# EAGLE board pulse-generator (EAGLE 7.6.0)
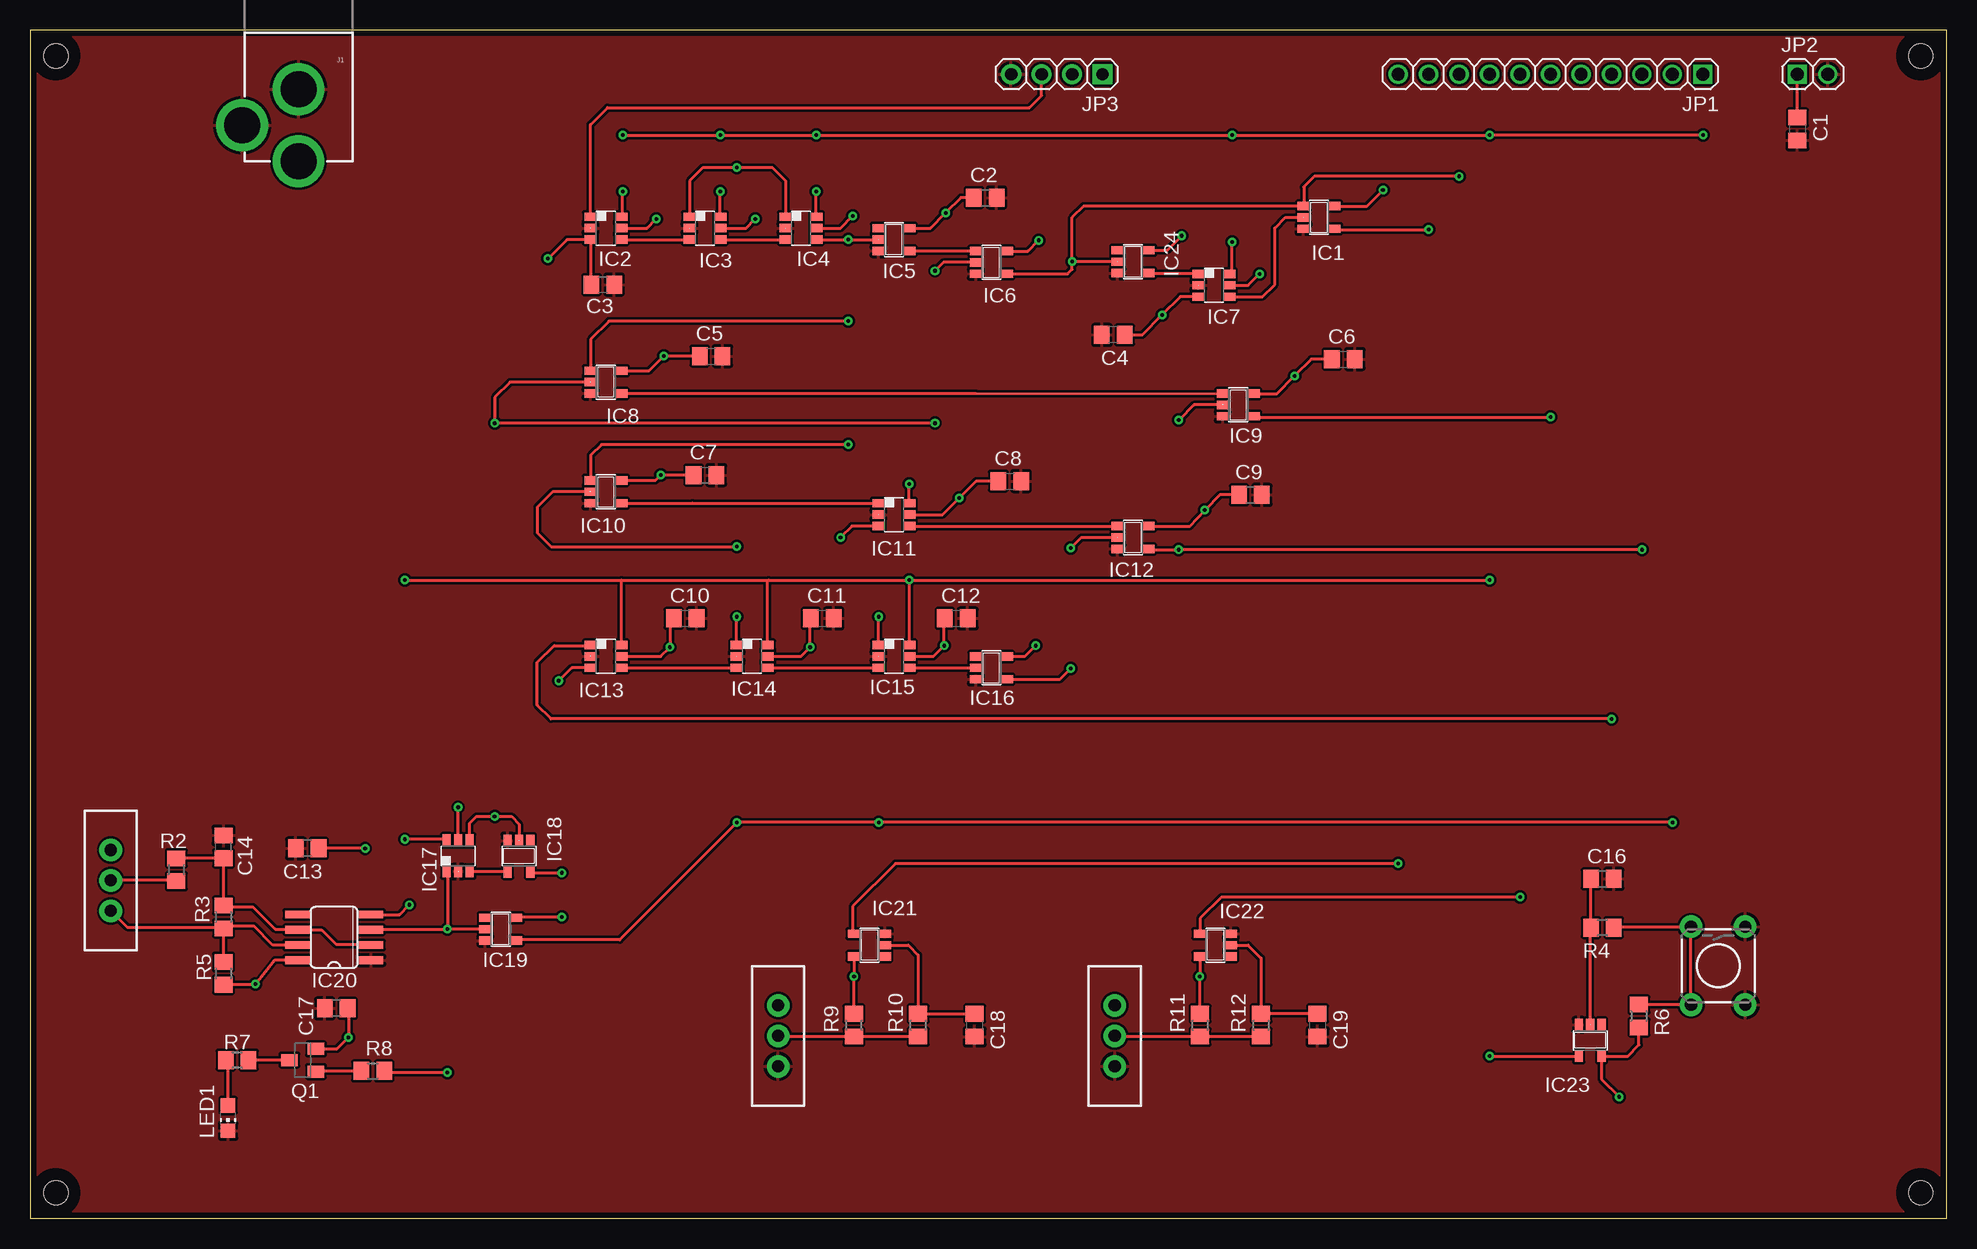
[diagram p0: board, top side]
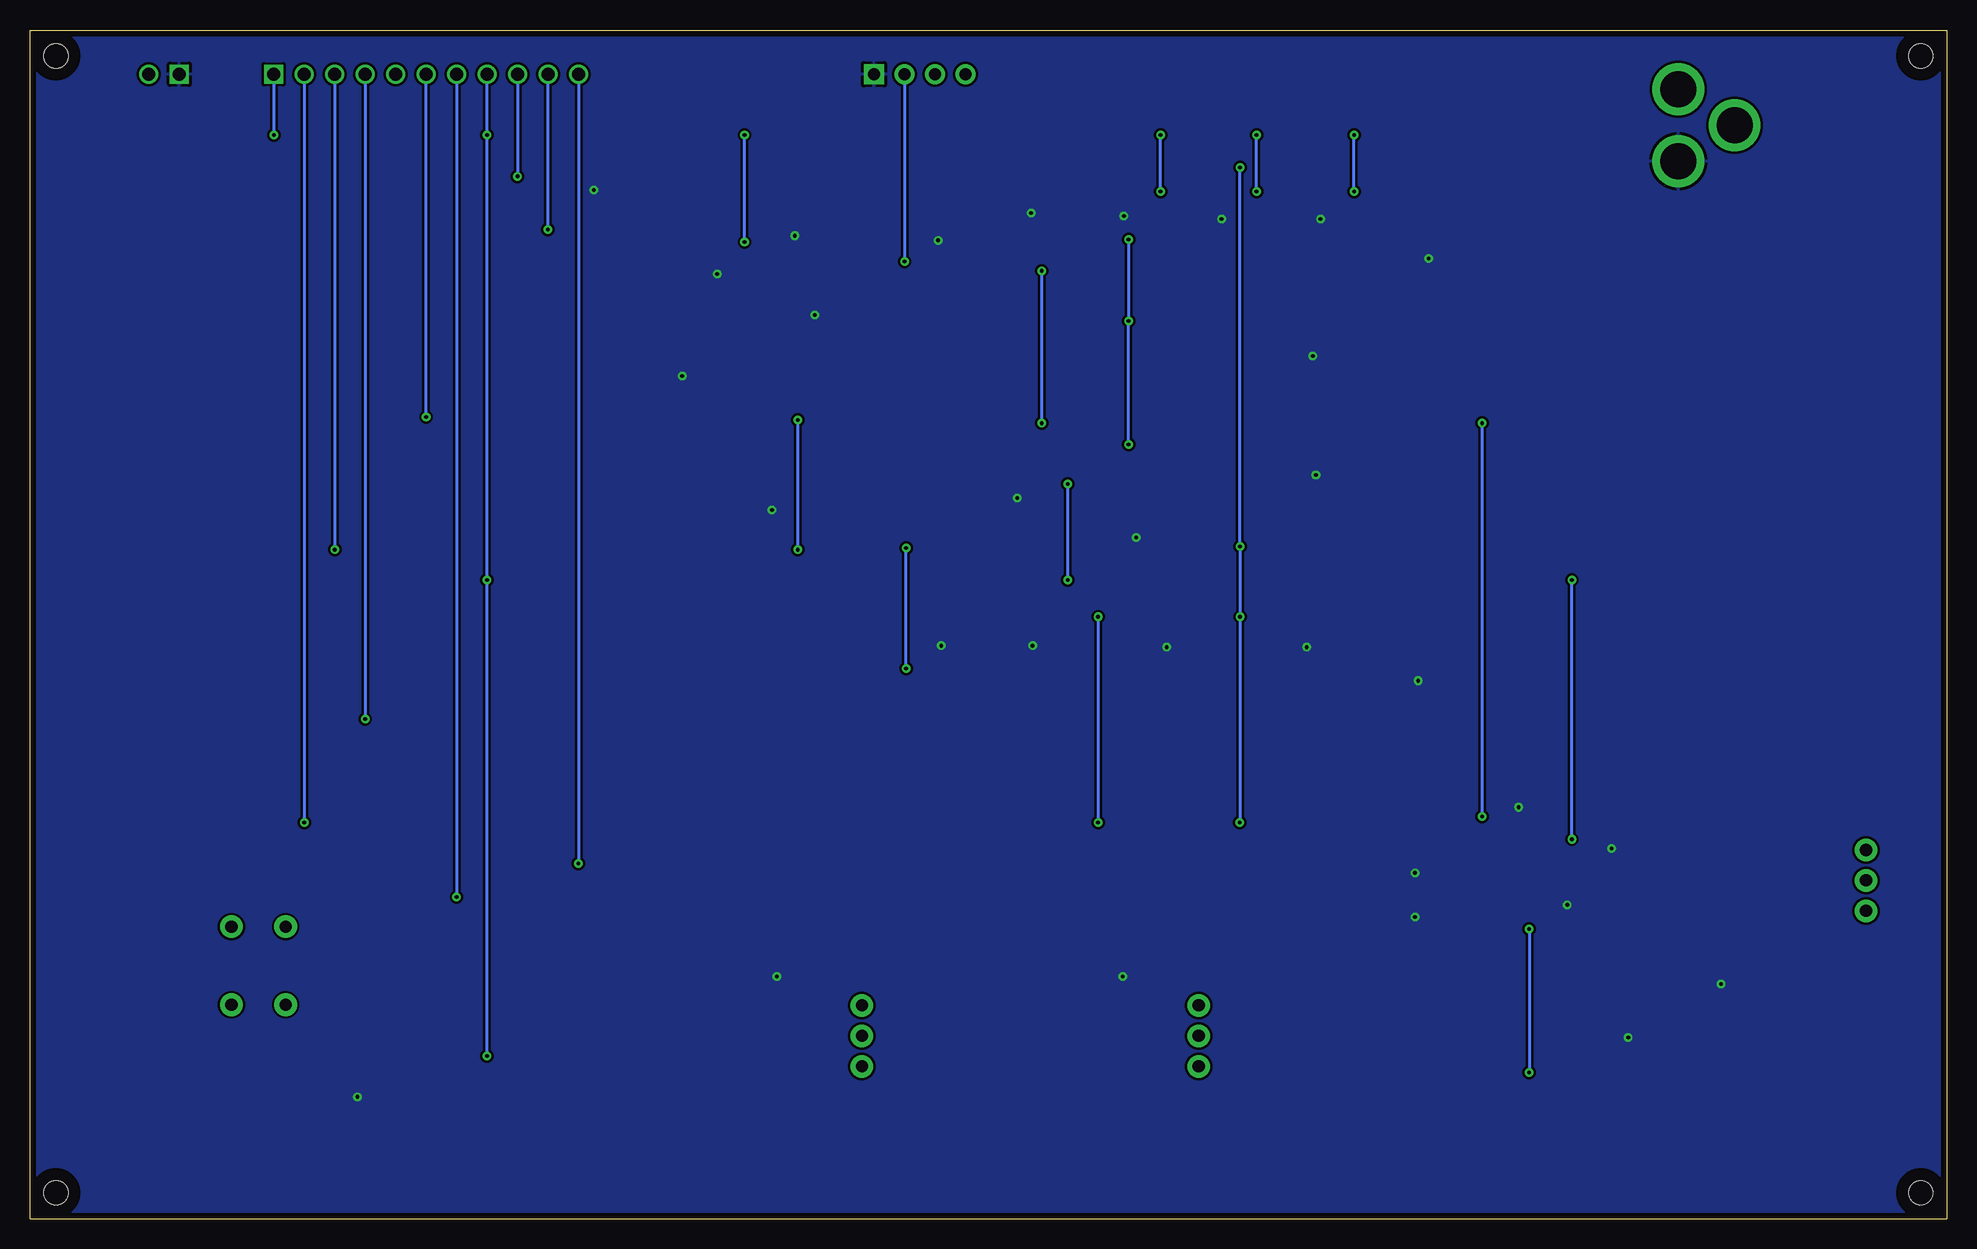
[diagram p1: board, bottom side, seen from below]

Size 159.77 x 99.06 mm. Coordinates in mm from the lower left corner, seen from the top.
Outline: 159.77,99.06 0,99.06 0,0 159.77,0 159.77,99.06
Copper layers (1*16): Top 0.035mm / dielectric 1.5mm / Bottom 0.035mm
Design rules "default *": minimum track width 8mil, minimum drill 12mil, track to track 8mil, track to pad 8mil, pad to pad 8mil, via to via 8mil, smd to smd 8mil, copper to edge 20mil, drill to drill 8mil, minimum pad ring 10mil, minimum via ring 8mil, stop-mask expansion 4mil, vias tented up to drill 0mil, thermal gap 10mil
Holes 2.01 mm at 2.16,2.16 157.61,2.16 157.61,96.9 2.16,96.9
tRestrict: area 155.6,0.2 to 159.6,4.2; area 155.6,94.9 to 159.6,98.9; area 0.2,94.9 to 4.2,98.9; area 0.2,0.2 to 4.2,4.2
bRestrict: area 155.6,0.2 to 159.6,4.2; area 155.6,94.9 to 159.6,98.9; area 0.2,94.9 to 4.2,98.9; area 0.2,0.2 to 4.2,4.2

## Footprints (pad centres in the part's own frame; a part is rotated, then mirrored left to right if it is on the bottom)
C0805 = smd 1.3 x 1.5: 1 -0.95,0; 2 0.95,0
SOT23-5 = smd 0.69 x 0.99: 1 -0.95,-1.29; 2 0,-1.29; 3 0.95,-1.29; 4 0.95,1.3; 5 -0.95,1.3
DBV_R-PDSO-G6 = smd 0.69 x 0.99: 1 -0.95,-1.29; 2 0,-1.29; 3 0.95,-1.29; 4 0.95,1.3; 5 0,1.3; 6 -0.95,1.3
SO08 = smd 0.66 x 2.032: 1 -1.905,-3.073; 2 -0.635,-3.073; 3 0.635,-3.073; 4 1.905,-3.073; 5 1.905,3.073; 6 0.635,3.073; 7 -0.635,3.073; 8 -1.905,3.073
POWER_JACK_PTH = drill 2.997 pad 4.318: GND 0,7.7; GNDBREAK 4.7,10.7; PWR 0,13.7
1X11 = drill 1.067 square: 1 -12.7,0 | drill 1.067: 2 -10.16,0; 3 -7.62,0; 4 -5.08,0; 5 -2.54,0; 6 0,0; 7 2.54,0; 8 5.08,0; 9 7.62,0; 10 10.16,0; 11 12.7,0
1X02 = drill 1.067 square: 1 -1.27,0 | drill 1.067: 2 1.27,0
1X04 = drill 1.016 pad 1.676 square: 1 -3.81,0 | drill 1.016 pad 1.676: 2 -1.27,0; 3 1.27,0; 4 3.81,0
CHIP-LED0805 = smd 1.2 x 1.2: A 0,-1.05; C 0,1.05
SOT23-BEC = smd 1 x 1.4: B -0.95,-1.1; C 0,1.1; E 0.95,-1.1
R0805 = smd 1.3 x 1.5: 1 -0.95,0; 2 0.95,0
SWITCH-SPDT = drill 1.016 pad 1.88: 1 0,2.54; 2 0,0; 3 0,-2.54
TACTILE-PTH = drill 1.016 pad 1.88: 1 -3.251,2.261; 2 3.251,2.261; 3 -3.251,-2.261; 4 3.251,-2.261

## Placement (x,y rotation side)
C1  10uF  [C0805]  147.32,90.81 270 top
C2  10uF  [C0805]  79.63,85.09 0 top
C3  1uF  [C0805]  47.75,77.85 0 top
C4  10uF  [C0805]  90.3,73.66 180 top
C5  10uF  [C0805]  56.77,71.88 0 top
C6  1uF  [C0805]  109.47,71.63 0 top
C7  1uF  [C0805]  56.26,61.98 0 top
C8  10uF  [C0805]  81.66,61.47 0 top
C9  1uF  [C0805]  101.73,60.33 0 top
C10  10uF  [C0805]  54.61,50.04 0 top
C11  1uF  [C0805]  66.04,50.04 0 top
C12  1uF  [C0805]  77.22,50.04 0 top
C13  10uF  [C0805]  23.11,30.86 180 top
C14  10uF  [C0805]  16.13,30.99 90 top
C16  10uF  [C0805]  131.06,28.32 0 top
C17  10uF  [C0805]  25.53,17.53 180 top
C18  [C0805]  78.74,16.13 270 top
C19  [C0805]  107.31,16.13 270 top
IC1  74LVC1G08DBV  [SOT23-5]  107.44,83.44 270 top
IC2  741G175  [DBV_R-PDSO-G6]  48.01,82.55 270 top
IC3  741G175  [DBV_R-PDSO-G6]  56.26,82.55 270 top
IC4  741G175  [DBV_R-PDSO-G6]  64.26,82.55 270 top
IC5  74LVC1G04DBV  [SOT23-5]  72.01,81.6 270 top
IC6  74LVC1G08DBV  [SOT23-5]  80.14,79.69 270 top
IC7  741G175  [DBV_R-PDSO-G6]  98.68,77.79 270 top
IC8  74LVC1G08DBV  [SOT23-5]  48.01,69.72 270 top
IC9  74LVC1G08DBV  [SOT23-5]  100.71,67.82 270 top
IC10  74LVC1G08DBV  [SOT23-5]  48.01,60.58 270 top
IC11  741G175  [DBV_R-PDSO-G6]  72.01,58.67 270 top
IC12  74LVC1G08DBV  [SOT23-5]  91.95,56.77 270 top
IC13  741G175  [DBV_R-PDSO-G6]  48.01,46.86 270 top
IC14  741G175  [DBV_R-PDSO-G6]  60.2,46.86 270 top
IC15  741G175  [DBV_R-PDSO-G6]  72.01,46.86 270 top
IC16  74LVC1G04DBV  [SOT23-5]  80.14,45.91 270 top
IC17  741G175  [DBV_R-PDSO-G6]  35.69,30.23 0 top
IC18  74LVC1G04DBV  [SOT23-5]  40.77,30.23 180 top
IC19  74LVC1G04DBV  [SOT23-5]  39.24,24.13 270 top
IC20  NE555D  [SO08]  25.35,23.44 90 top
IC21  74LVC1G17DBV  [SOT23-5]  69.98,22.8 90 top
IC22  74LVC1G17DBV  [SOT23-5]  98.81,22.8 90 top
IC23  74LVC1G17DBV  [SOT23-5]  130.05,14.86 180 top
IC24  74LVC1G04DBV  [SOT23-5]  91.95,79.76 270 top
J1  POWER_JACKPTH  [POWER_JACK_PTH]  22.38,101.83 180 top
JP1  [1X11]  126.75,95.38 180 top
JP2  [1X02]  148.59,95.38 0 top
JP3  [1X04]  85.6,95.38 180 top
LED1  [CHIP-LED0805]  16.51,8.38 180 top
Q1  MMBT2907ALT1SMD  [SOT23-BEC]  22.73,13.21 90 top
R2  8.2K  [R0805]  12.19,29.08 270 top
R3  33K  [R0805]  16.13,25.15 270 top
R4  10k  [R0805]  131.06,24.26 180 top
R5  1K  [R0805]  16.13,20.45 270 top
R6  100k  [R0805]  134.11,16.89 270 top
R7  270  [R0805]  17.27,13.21 180 top
R8  1K  [R0805]  28.57,12.32 0 top
R9  [R0805]  68.68,16.13 90 top
R10  [R0805]  74.04,16.13 90 top
R11  [R0805]  97.54,16.13 90 top
R12  [R0805]  102.62,16.13 90 top
S1  [SWITCH-SPDT]  6.73,28.19 0 top
S2  [TACTILE-PTH]  140.72,21.08 270 top
S3  [SWITCH-SPDT]  62.36,15.24 0 top
S4  [SWITCH-SPDT]  90.42,15.24 0 top

## Library data of the parts
C1-C14 C16-C19 R2-R12 = resistor
IC1 IC5 IC6 IC8-IC10 IC12 IC16 IC18 IC19 IC21-IC24 = 74xx-little-us
IC2-IC4 IC7 IC11 IC13-IC15 IC17 = witch-e
IC20 = adafruit
J1 = SparkFun-Connectors; PROD_ID: PRT-00119
JP1-JP3 = pinhead
LED1 = led
Q1 = transistor-pnp
S1-S4 = SparkFun-Electromechanical

## Nets
9A_PULSE: IC1.4 JP1.10
10A_PULSE: IC1.1 IC6.4 IC24.2 JP1.9 JP3.2
!MCLK: IC3.1 IC4.1 IC10.2 IC14.1 IC15.1 IC19.4 JP1.2
!RST: IC2.6 IC3.6 IC4.6 IC7.6 IC11.6 IC13.6 IC14.6 IC15.6 IC17.6 IC23.4 JP1.1 JP1.8
!TDONE: IC5.4 IC6.1
ADD/COMP: IC22.4 JP1.7
CARRY_DONE: IC13.1 JP1.4
CARRY_OE: IC9.2 IC12.4 JP1.3
CARRY_PULSE: IC9.4 JP1.6
CLR: IC21.4 JP1.11
GND: C1.2 C2.2 C3.2 C4.2 C5.2 C6.2 C7.2 C8.2 C9.2 C10.2 C11.2 C12.2 C13.2 C14.2 C16.2 C17.2 C18.2 C19.2 IC1.3 IC2.2 IC3.2 IC4.2 IC5.3 IC6.3 IC7.2 IC8.3 IC9.3 IC10.3 IC11.2 IC12.3 IC13.2 IC14.2 IC15.2 IC16.3 IC17.2 IC18.3 IC19.3 IC20.1 IC21.3 IC22.3 IC23.3 IC24.3 J1.GND J1.GNDBREAK JP2.2 JP3.4 LED1.C S2.1 S2.2 S3.3 S4.3
MCLK: IC17.1 IC19.2 IC20.3 R8.2
N$1: IC17.3 IC18.4
N$2: C14.1 IC20.2 IC20.6 R2.1 R3.1
N$3: IC20.7 R3.2 R5.1 S1.3
N$4: R2.2 S1.2
N$5: Q1.B R8.1
N$6: Q1.C R7.1
N$7: LED1.A R7.2
N$8: IC2.4 IC3.3
N$9: IC8.4 IC9.1
N$11: IC13.4 IC14.3
N$12: IC1.2 IC7.4
N$13: IC12.2 IC16.4
N$14: IC3.4 IC4.3
N$15: IC11.4 IC12.1
N$16: IC10.4 IC11.1
N$17: IC14.4 IC15.3
N$18: IC15.4 IC16.2
N$19: C16.1 IC23.2 R4.2
N$20: R4.1 R6.1 S2.3 S2.4
N$21: C18.1 IC21.2 R10.2
N$22: R9.1 R10.1 S3.2
N$23: IC7.1 IC24.4
N$29: C19.1 IC22.2 R12.2
N$30: R11.1 R12.1 S4.2
TCLK: IC6.2 IC8.2 IC17.4 IC18.2
TDONE: IC4.4 IC5.2 IC8.1 IC10.1
VCC: C1.1 C2.1 C3.1 C4.1 C5.1 C6.1 C7.1 C8.1 C9.1 C10.1 C11.1 C12.1 C13.1 C17.1 IC1.5 IC2.3 IC2.5 IC3.5 IC4.5 IC5.5 IC6.5 IC7.3 IC7.5 IC8.5 IC9.5 IC10.5 IC11.3 IC11.5 IC12.5 IC13.3 IC13.5 IC14.5 IC15.5 IC16.5 IC17.5 IC18.5 IC19.5 IC20.4 IC20.8 IC21.5 IC22.5 IC23.5 IC24.5 J1.PWR JP2.1 JP3.1 Q1.E R5.2 R6.2 R9.2 R11.2
ZC: IC2.1 JP3.3

## Tracks (layer width: path | path; a pad name or v marks a point on that pad's centre or on a via)
9A_PULSE  (via drill 0.3)
  Top 0.254: IC1.4 108.81,82.42 v116.59,82.42
  Bottom 0.254: v116.59,82.42 JP1.10
10A_PULSE  (via drill 0.3)
  Top 0.254: v119.13,86.87 107.06,86.87 106.17,85.98 106.17,84.41 IC1.1 87.82,84.39 86.87,83.44 v86.87,79.76 | IC24.2 v86.87,79.76 | IC6.4 86.49,78.74 86.87,79.12 v86.87,79.76
  Bottom 0.254: JP1.9 v119.13,86.87 | JP3.2 v86.87,79.76
!MCLK  (via drill 0.3)
  Top 0.254: v136.91,33.02 v70.74,33.02 v58.93,33.02 49.15,23.24 40.6,23.24 IC19.4 | IC15.1 70.72,50.15 v70.74,50.16 | IC4.1 62.99,83.52 62.99,86.49 61.87,87.61 v58.91,87.61 56.11,87.61 54.99,86.49 54.99,83.52 IC3.1 | IC10.2 43.56,60.58 42.29,59.31 42.29,57.15 43.43,56.01 v58.91,56.01 | IC14.1 v58.91,50.16
  Bottom 0.254: JP1.2 v136.91,33.02 | 58.93,87.63 v58.91,87.61 v58.91,56.01 v58.91,50.16 58.91,50.04 58.91,33.04 v58.93,33.02 | v70.74,50.16 v70.74,33.02
!RST  (via drill 0.3)
  Top 0.254: 49.31,90.3 v49.4,90.3 v57.53,90.3 v65.53,90.3 v100.2,90.3 v121.67,90.3 v139.45,90.3 | IC7.6 100.2,78.96 v100.2,81.41 | IC13.6 49.31,53.21 | 61.59,53.21 v73.28,53.21 | v121.67,53.21 73.66,53.21 v73.28,53.21 | IC14.6 61.5,53.12 61.59,53.21 | IC15.6 73.31,53.18 v73.28,53.21 | v121.67,13.56 IC23.4 | IC3.6 arc-90 57.53,83.53 v57.53,85.6 | IC4.6 arc-90 65.53,83.53 v65.53,85.6 | IC2.6 arc90 49.4,83.6 v49.4,85.6 | v31.24,53.21 49.31,53.21 | 49.31,53.21 61.59,53.21 | IC17.6 34.64,31.62 v31.24,31.62 | IC11.6 arc-90 73.28,59.65 v73.28,61.21
  Bottom 0.254: JP1.8 v121.67,90.3 v121.67,53.21 v121.67,13.56 | v100.2,81.41 v100.2,90.3 | v57.53,85.6 v57.53,90.3 | v65.53,85.6 v65.53,90.3 | v49.4,85.6 v49.4,90.3 | JP1.1 v139.45,90.3 | v31.24,31.62 v31.24,53.21 | v73.28,61.21 v73.28,53.21
!TDONE
  Top 0.254: IC5.4 IC6.1
ADD/COMP  (via drill 0.3)
  Top 0.254: v124.21,26.8 99.31,26.8 97.54,25.02 97.54,23.78 IC22.4
  Bottom 0.254: JP1.7 v124.21,26.8
CARRY_DONE  (via drill 0.3)
  Top 0.254: v131.83,41.66 43.43,41.66 42.29,42.8 42.29,46.35 43.69,47.75 46.66,47.75 IC13.1
  Bottom 0.254: JP1.4 v131.83,41.66
CARRY_OE  (via drill 0.3)
  Top 0.254: IC12.4 93.31,55.75 v95.76,55.75 v134.37,55.75 | IC9.2 97.03,67.82 v95.76,66.55
  Bottom 0.254: JP1.3 v134.37,55.75 | v95.76,55.75 v95.76,66.55
CARRY_PULSE  (via drill 0.3)
  Top 0.254: IC9.4 102.08,66.8 v126.75,66.8
  Bottom 0.254: v126.75,66.8 JP1.6
CLR  (via drill 0.3)
  Top 0.254: IC21.4 68.58,23.84 68.58,26.04 72.14,29.59 v114.05,29.59
  Bottom 0.254: JP1.11 v114.05,29.59
GND
  pour Top: 0,0 159.77,0 159.77,99.06 0,99.06
MCLK  (via drill 0.3)
  Top 0.254: IC20.3 28.47,24.13 v34.8,24.13 | IC17.1 arc-90 34.8,28.88 v34.8,24.13 | IC19.2 v34.8,24.13 | R8.2 29.55,12.19 v34.8,12.19
  Bottom 0.254: v34.8,24.13 v34.8,12.19
N$1
  Top 0.254: IC17.3 39.81,28.94 IC18.4
N$2
  Top 0.254: IC20.2 28.37,22.86 25.53,22.86 24.31,24.08 IC20.6 22.23,24.13 20.45,24.13 18.58,26 16.13,26 R3.1 C14.1 R2.1
N$3
  Top 0.254: IC20.7 20.24,22.81 18.67,24.38 16.22,24.38 R3.2 | R5.1 R3.2 | S1.3 8.09,24.3 16.13,24.3 R3.2
N$4
  Top 0.254: R2.2 12.15,28.19 S1.2
N$5
  Top 0.254: Q1.B 23.89,12.32 R8.1
N$6
  Top 0.254: Q1.C R7.1
N$7
  Top 0.254: LED1.A 16.51,13.12 R7.2
N$8
  Top 0.254: IC2.4 IC3.3
N$9
  Top 0.254: IC8.4 78.84,68.77 IC9.1
N$11
  Top 0.254: IC13.4 IC14.3
N$12
  Top 0.254: IC7.4 102.75,76.84 103.76,77.85 103.76,82.55 104.65,83.44 IC1.2
N$13  (via drill 0.3)
  Top 0.254: IC16.4 85.86,44.96 v86.74,45.85 | IC12.2 87.63,56.77 87.06,56.2 v86.74,55.88
  Bottom 0.254: v86.74,45.85 v86.74,55.88
N$14
  Top 0.254: IC3.4 IC4.3
N$15
  Top 0.254: IC11.4 IC12.1
N$16
  Top 0.254: IC10.4 55.22,59.63 IC11.1
N$17
  Top 0.254: IC14.4 IC15.3
N$18
  Top 0.254: IC15.4 IC16.2
N$19
  Top 0.254: IC23.2 130.05,24.19 R4.2 C16.1
N$20
  Top 0.254: R4.1 132.09,24.33 S2.3 S2.4 134.12,17.83 R6.1
N$21
  Top 0.254: IC21.2 73.22,22.8 74.04,21.97 R10.2 C18.1
N$22
  Top 0.254: R10.1 R9.1 62.42,15.18 S3.2
N$23
  Top 0.254: IC24.4 97.32,78.81 IC7.1
N$29
  Top 0.254: IC22.2 101.54,22.8 102.62,21.72 R12.2 C19.1
N$30
  Top 0.254: R12.1 R11.1 90.48,15.18 S4.2
TCLK  (via drill 0.3)
  Top 0.254: IC17.4 36.64,32.95 37.21,33.53 v38.73,33.53 40.13,33.53 40.77,32.89 IC18.2 | IC6.2 76.14,79.69 v75.44,78.99 | v75.44,66.29 v38.73,66.29 38.73,68.45 40.01,69.72 IC8.2
  Bottom 0.254: v38.73,66.29 v38.73,33.53 | v75.44,78.99 v75.44,66.29
TDONE  (via drill 0.3)
  Top 0.254: IC4.4 v68.2,81.6 IC5.2 | v68.2,64.52 47.62,64.52 46.74,63.63 46.74,61.55 IC10.1 | v68.2,74.8 48.26,74.8 46.74,73.28 46.74,70.69 IC8.1
  Bottom 0.254: v68.2,64.52 v68.2,74.8 v68.2,81.6
VCC  (via drill 0.3)
  Top 0.254: IC20.4 30.81,25.35 v31.62,26.16 | IC20.8 20.4,21.54 v18.8,19.56 16.17,19.56 R5.2 | IC17.5 v35.69,34.29 | IC18.5 arc90 41.81,28.83 v44.32,28.83 | IC19.5 40.61,25.15 v44.32,25.15 | Q1.E 25.59,14.16 v26.54,15.11 26.54,17.46 C17.1 | C1.1 JP2.1 | IC11.3 68.52,57.72 v67.56,56.77 | IC11.5 76.07,58.67 v77.47,60.07 78.87,61.47 C8.1 | IC16.5 82.93,46.86 v83.82,47.75 | IC15.5 75.31,46.86 v76.2,47.75 76.2,49.97 C12.1 | IC14.5 64.26,46.86 v65.02,47.62 65.02,49.97 C11.1 | IC13.5 52.58,46.86 v53.34,47.62 53.34,49.72 C10.1 | IC13.3 45.15,45.91 v44.07,44.83 44.13,44.77 | IC12.5 96.71,57.72 v97.92,59.05 99.19,60.33 C9.1 | IC9.5 103.95,68.77 v105.41,70.23 106.81,71.63 C6.1 | IC8.5 51.62,70.67 v52.83,71.88 C5.1 | IC2.5 51.44,82.55 v52.2,83.31 | IC3.5 59.69,82.55 v60.45,83.31 60.52,83.38 | IC4.5 67.56,82.55 v68.58,83.57 | IC5.5 75.06,82.55 v76.33,83.82 77.6,85.09 C2.1 | IC6.5 83.18,80.64 v84.07,81.53 | IC7.3 95.89,76.84 v94.36,75.31 92.71,73.66 C4.1 | IC7.5 101.54,77.79 v102.49,78.74 | IC1.5 111.44,84.39 v112.78,85.72 | IC21.5 v68.68,20.19 R9.2 | R11.2 97.51,17.11 v97.51,20.19 IC22.5 | v27.94,30.86 C13.1 | v132.46,10.16 131,11.62 IC23.5 133.19,13.56 134.11,14.48 R6.2 | C3.1 46.72,77.94 IC2.3 44.77,81.6 v43.18,80.01 | C7.1 v52.58,61.98 52.13,61.53 IC10.5 | IC24.5 94.8,80.71 v96.01,81.92
  pour Bottom: 0,0 159.77,0 159.77,99.06 0,99.06
ZC
  Top 0.254: IC2.1 46.72,91.17 48.13,92.58 83.31,92.58 84.33,93.6 JP3.3

## Text on the board
Document: Pulse Generator / http://witch-e.org | RESET/RUN | MCLK | ADD/COMP | CLEAR